# EAGLE board ms-adsr-02 (EAGLE 6.5.0)
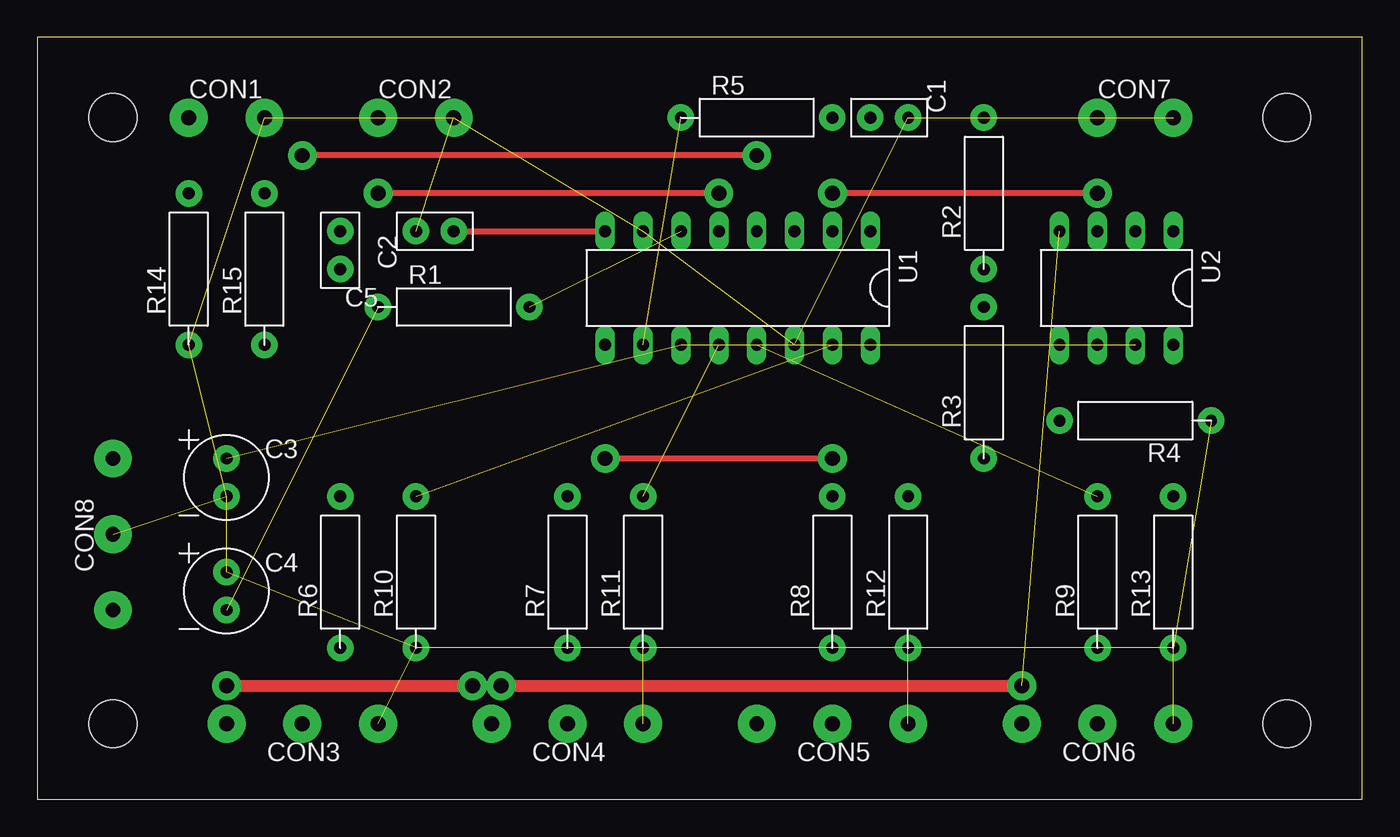
[diagram p0: board, top side]
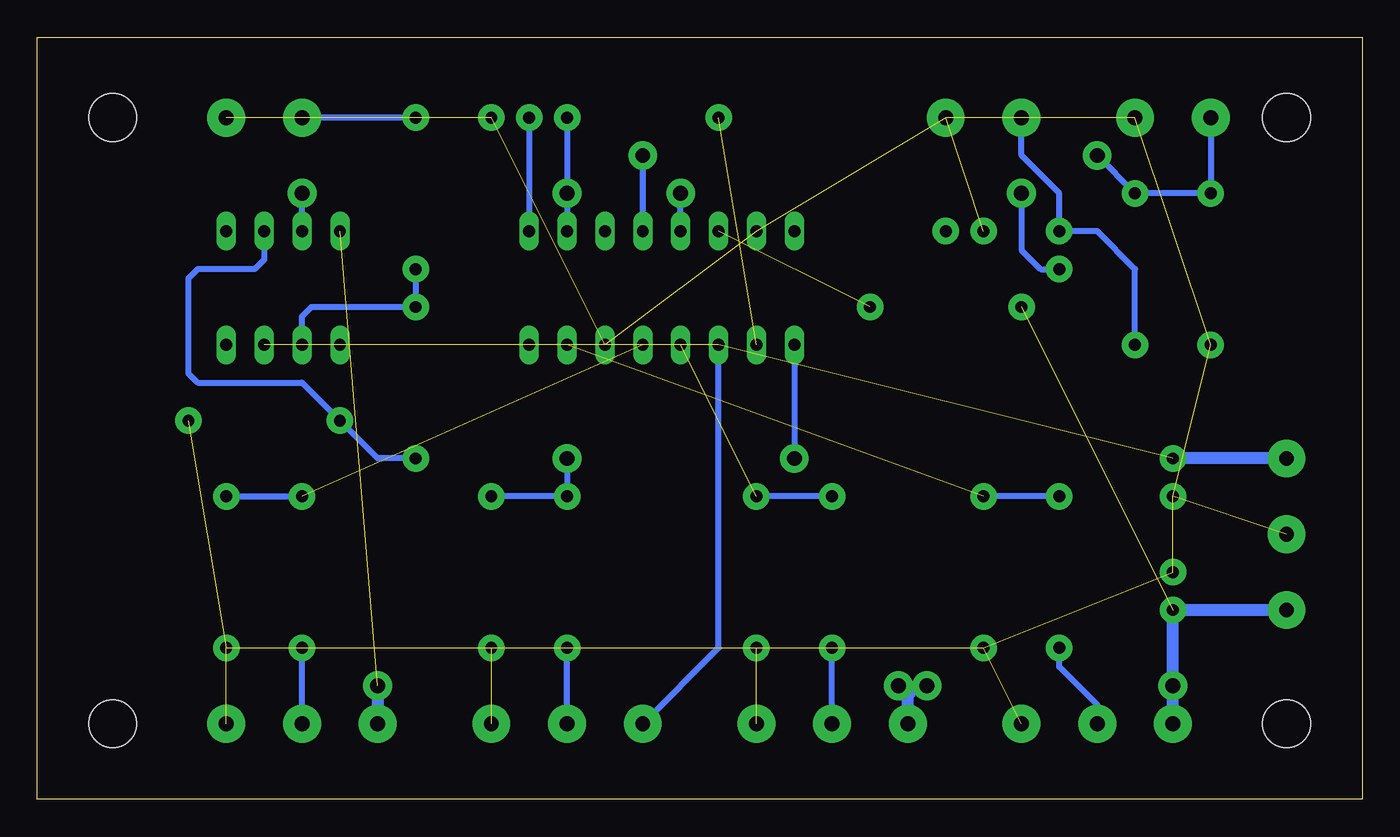
[diagram p1: board, bottom side, seen from below]

Size 88.88 x 51.1 mm. Coordinates in mm from the lower left corner, seen from the top.
Outline: 0,0 88.88,0 88.88,51.1 0,51.1 0,0
Copper layers (1*16): Top 0.035mm / dielectric 1.5mm / Bottom 0.035mm
Design rules "default": minimum track width 10mil, minimum drill 24mil, track to track 8mil, track to pad 8mil, pad to pad 8mil, via to via 8mil, smd to smd 8mil, copper to edge 40mil, drill to drill 8mil, minimum pad ring 10mil, minimum via ring 8mil, stop-mask expansion 4mil, vias tented up to drill 0mil, thermal gap 10mil
Holes 3.2 mm at 5.08,5.08 5.08,45.72 83.82,5.08 83.82,45.72

## Footprints (pad centres in the part's own frame; a part is rotated, then mirrored left to right if it is on the bottom)
CAP01 = drill 0.8 pad 1.778: P$1 0,0; P$2 0,2.54
POLRADIAL01/2 = drill 0.8 pad 1.778: NEGATIVE 0,0; POSITIVE 0,2.54
PCB-STAKES-1X2 = drill 1 pad 2.54: 1 0,0; 2 0,5.08
PCB-STAKES-1X3-2 = drill 1 pad 2.54: 1 0,0; 2 0,-5.08; 3 0,-10.16
AXIAL04 = drill 0.8 pad 1.778: 1 -5.08,0; 2 5.08,0
DIL16 = drill 0.8 long: 1 0,0; 2 2.54,0; 3 5.08,0; 4 7.62,0; 5 10.16,0; 6 12.7,0; 7 15.24,0; 8 17.78,0; 9 17.78,7.62; 10 15.24,7.62; 11 12.7,7.62; 12 10.16,7.62; 13 7.62,7.62; 14 5.08,7.62; 15 2.54,7.62; 16 0,7.62
DIL8 = drill 0.8 long: 1 0,0; 2 2.54,0; 3 5.08,0; 4 7.62,0; 5 7.62,7.62; 6 5.08,7.62; 7 2.54,7.62; 8 0,7.62

## Placement (x,y rotation side)
C1  39n  [CAP01]  55.88,45.72 270 top
C2  10n  [CAP01]  27.94,38.1 90 top
C3  10u  [POLRADIAL01/2]  12.7,20.32 0 top
C4  10u  [POLRADIAL01/2]  12.7,12.7 0 top
C5  3n  [CAP01]  20.32,38.1 180 top
CON1  GATE  [PCB-STAKES-1X2]  10.16,45.72 270 top
CON2  TRIG  [PCB-STAKES-1X2]  22.86,45.72 270 top
CON3  ATTACK  [PCB-STAKES-1X3-2]  12.7,5.08 90 top
CON4  DECAY  [PCB-STAKES-1X3-2]  30.48,5.08 90 top
CON5  SUSTAIN  [PCB-STAKES-1X3-2]  48.26,5.08 90 top
CON6  RELEASE  [PCB-STAKES-1X3-2]  66.04,5.08 90 top
CON7  ENV_OUT  [PCB-STAKES-1X2]  71.12,45.72 270 top
CON8  POWER  [PCB-STAKES-1X3-2]  5.08,22.86 0 top
R1  450  [AXIAL04]  27.94,33.02 0 top
R2  1k  [AXIAL04]  63.5,40.64 90 top
R3  10k  [AXIAL04]  63.5,27.94 90 top
R4  10k  [AXIAL04]  73.66,25.4 180 top
R5  30k  [AXIAL04]  48.26,45.72 0 top
R6  47k  [AXIAL04]  20.32,15.24 90 top
R7  47k  [AXIAL04]  35.56,15.24 90 top
R8  47k  [AXIAL04]  53.34,15.24 90 top
R9  47k  [AXIAL04]  71.12,15.24 90 top
R10  910  [AXIAL04]  25.4,15.24 90 top
R11  910  [AXIAL04]  40.64,15.24 90 top
R12  33k  [AXIAL04]  58.42,15.24 90 top
R13  910  [AXIAL04]  76.2,15.24 90 top
R14  10k  [AXIAL04]  10.16,35.56 90 top
R15  0  [AXIAL04]  15.24,35.56 90 top
U1  CEM3310  [DIL16]  55.88,38.1 180 top
U2  TL071P  [DIL8]  76.2,38.1 180 top

## Library data of the parts
C1-C5 CON1-CON8 R1-R15 U1 U2 = steves

## Nets
+12V: C3.POSITIVE CON5.1 CON8.1 U1.11 U2.7
-12V: C4.NEGATIVE CON3.1 CON4.1 CON6.1 CON8.3 R1.1 U2.4
GND: C1.P$2 C2.P$2 C3.NEGATIVE C4.POSITIVE CON1.2 CON2.2 CON3.3 CON4.3 CON5.3 CON6.3 CON7.2 CON8.2 R4.1 R10.1 R11.1 R12.1 R13.1 R14.1 U1.7 U1.14
N$1: R1.2 U1.6
N$2: C1.P$1 U1.1
N$3: C2.P$1 U1.8
N$4: CON7.1 R2.2
N$5: R2.1 R3.2 U2.6
N$6: R3.1 R4.2 U2.2
N$7: R5.2 U1.2 U2.3
N$8: R5.1 U1.10
N$9: CON4.2 R7.1
N$10: CON6.2 R9.1
N$11: CON3.2 R6.1
N$12: R9.2 R13.2 U1.13
N$13: R7.2 R11.2 U1.12
N$14: R6.2 R10.2 U1.15
N$15: CON5.2 R8.1
N$16: R8.2 R12.2 U1.9
N$17: CON1.1 R14.2 R15.2 U1.4
N$19: C5.P$1 CON2.1 R15.1
N$20: C5.P$2 U1.5

## Tracks (layer width: path | path; a pad name or v marks a point on that pad's centre or on a via)
+12V  (2 unrouted)
  Bottom 0.406: CON5.1 43.18,10.16 U1.11
  Bottom 0.813: CON8.1 C3.POSITIVE
-12V  (via drill 1 pad 1.93)  (2 unrouted)
  Top 0.813: v12.7,7.62 v29.21,7.62 | v31.11,7.62 v66.04,7.62
  Bottom 0.813: CON3.1 v12.7,7.62 C4.NEGATIVE CON8.3 | v29.21,7.62 29.84,7.62 30.48,6.99 | CON4.1 30.48,6.99 | 30.48,6.99 v31.11,7.62 | v66.04,7.62 CON6.1
GND  (19 unrouted)
N$1  (1 unrouted)
N$2
  Bottom 0.406: C1.P$1 U1.1
N$3
  Top 0.406: C2.P$1 U1.8
N$4
  Bottom 0.406: R2.2 CON7.1
N$5
  Bottom 0.406: R2.1 R3.2 70.48,33.02 71.12,32.38 U2.6
N$6
  Bottom 0.406: R3.1 66.04,22.86 R4.2 71.12,27.94 78.11,27.94 78.74,28.57 78.74,34.92 78.11,35.56 74.3,35.56 73.66,36.2 U2.2
N$7  (via drill 1 pad 1.93)
  Top 0.406: v71.12,40.64 v53.34,40.64
  Bottom 0.406: R5.2 v53.34,40.64 U1.2 | U2.3 v71.12,40.64
N$8  (1 unrouted)
N$9
  Bottom 0.406: CON4.2 R7.1
N$10
  Bottom 0.406: CON6.2 R9.1
N$11
  Bottom 0.406: CON3.2 17.78,6.35 20.32,8.89 R6.1
N$12  (1 unrouted)
  Bottom 0.406: R13.2 R9.2
N$13  (1 unrouted)
  Bottom 0.406: R7.2 R11.2
N$14  (1 unrouted)
  Bottom 0.406: R6.2 R10.2
N$15
  Bottom 0.406: CON5.2 R8.1
N$16  (via drill 1 pad 1.93)
  Top 0.406: v38.1,22.86 v53.34,22.86
  Bottom 0.406: R12.2 R8.2 v53.34,22.86 | U1.9 v38.1,22.86
N$17  (via drill 1 pad 1.93)
  Top 0.406: v48.26,43.18 v17.78,43.18
  Bottom 0.406: CON1.1 R14.2 R15.2 v17.78,43.18 | U1.4 v48.26,43.18
N$19
  Bottom 0.406: CON2.1 22.86,43.18 20.32,40.64 C5.P$1 17.78,38.1 15.24,35.56 R15.1
N$20  (via drill 1 pad 1.93)
  Top 0.406: v45.72,40.64 v22.86,40.64
  Bottom 0.406: U1.5 v45.72,40.64 | v22.86,40.64 22.86,36.83 21.59,35.56 C5.P$2